# Altium PCB Pible_MODA.PcbDoc
Units mm, origin at the board's own origin, x right, y up, seen from the top; angles counter-clockwise.
Board outline 35.56 x 29.97 mm, 4 copper layers (Top Layer, Ground_Layer, Voltage_Layer, Bottom Layer), stack 0.778 mm thick; 52 components, 42 nets, 312 pads, 0 vias.
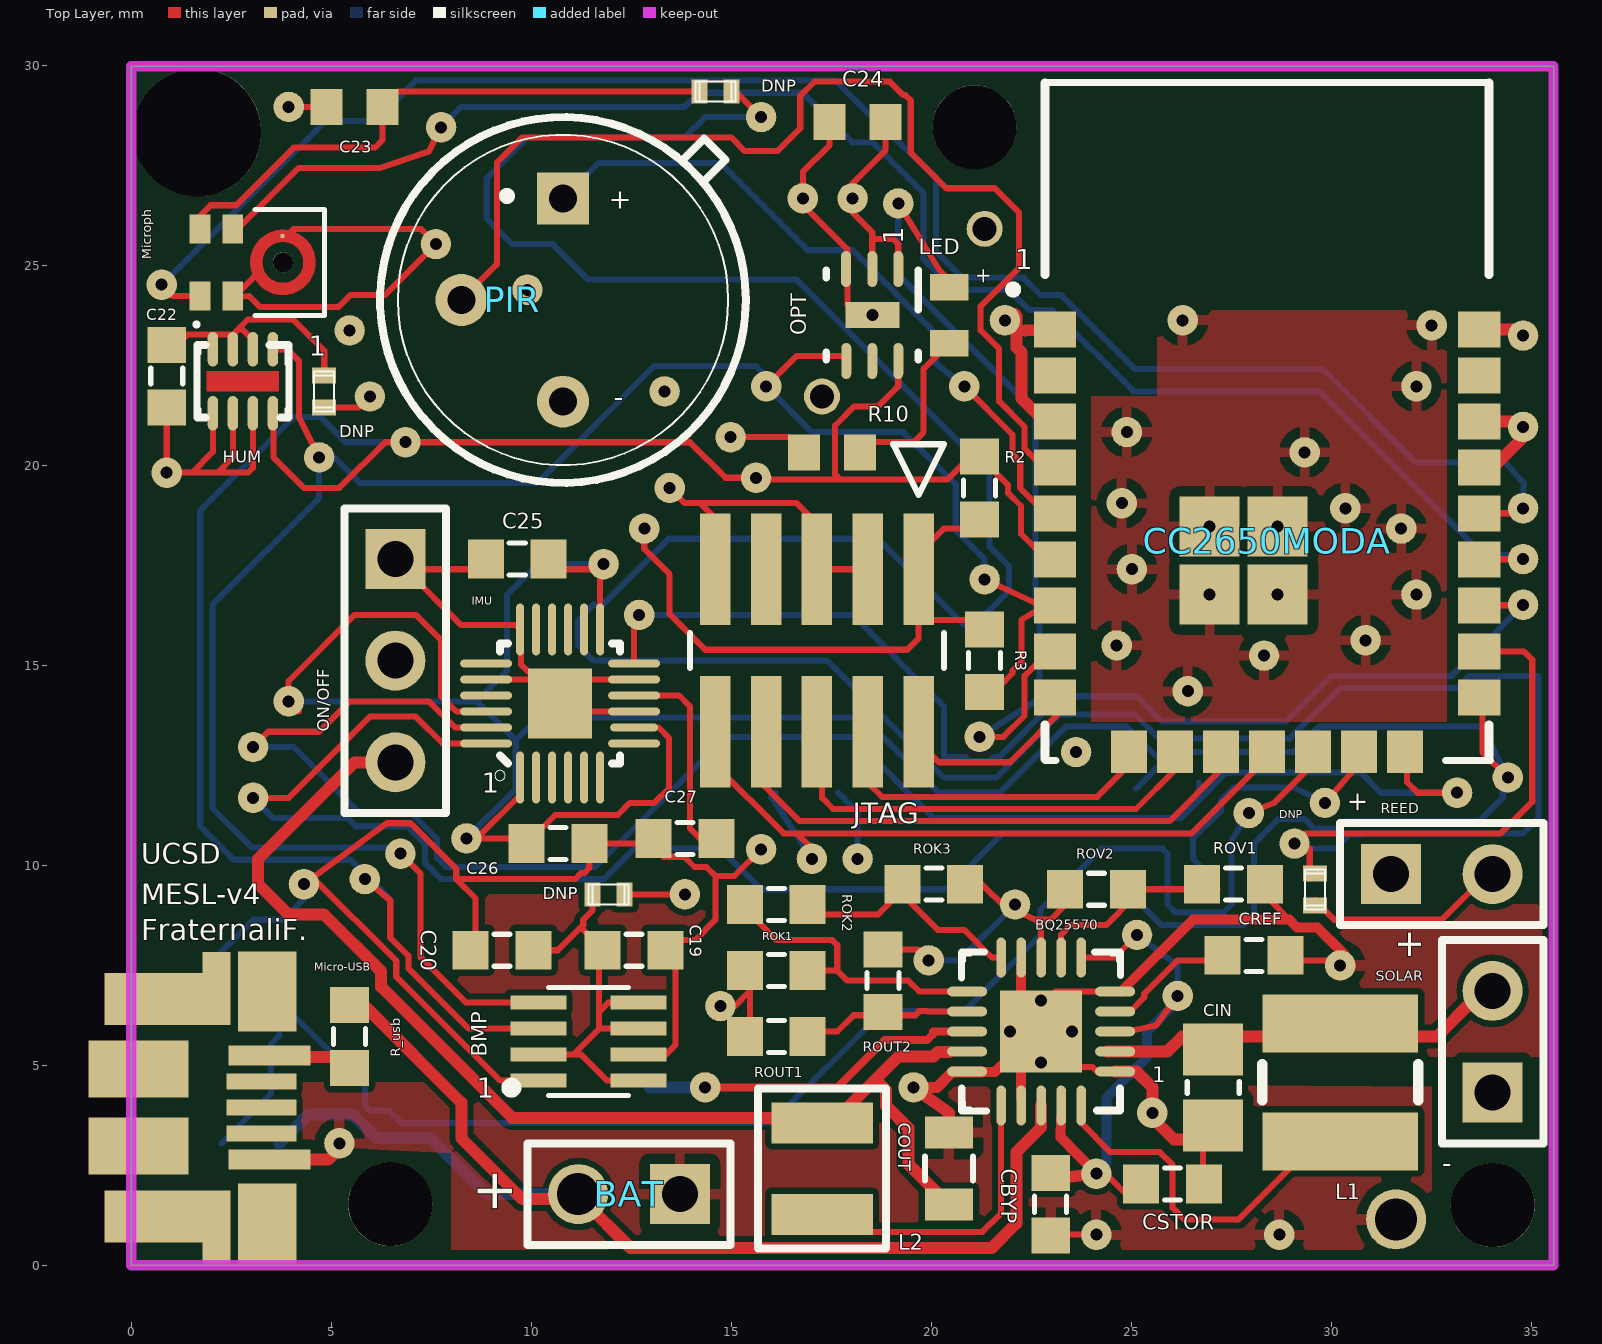
[diagram p0: Top Layer view]
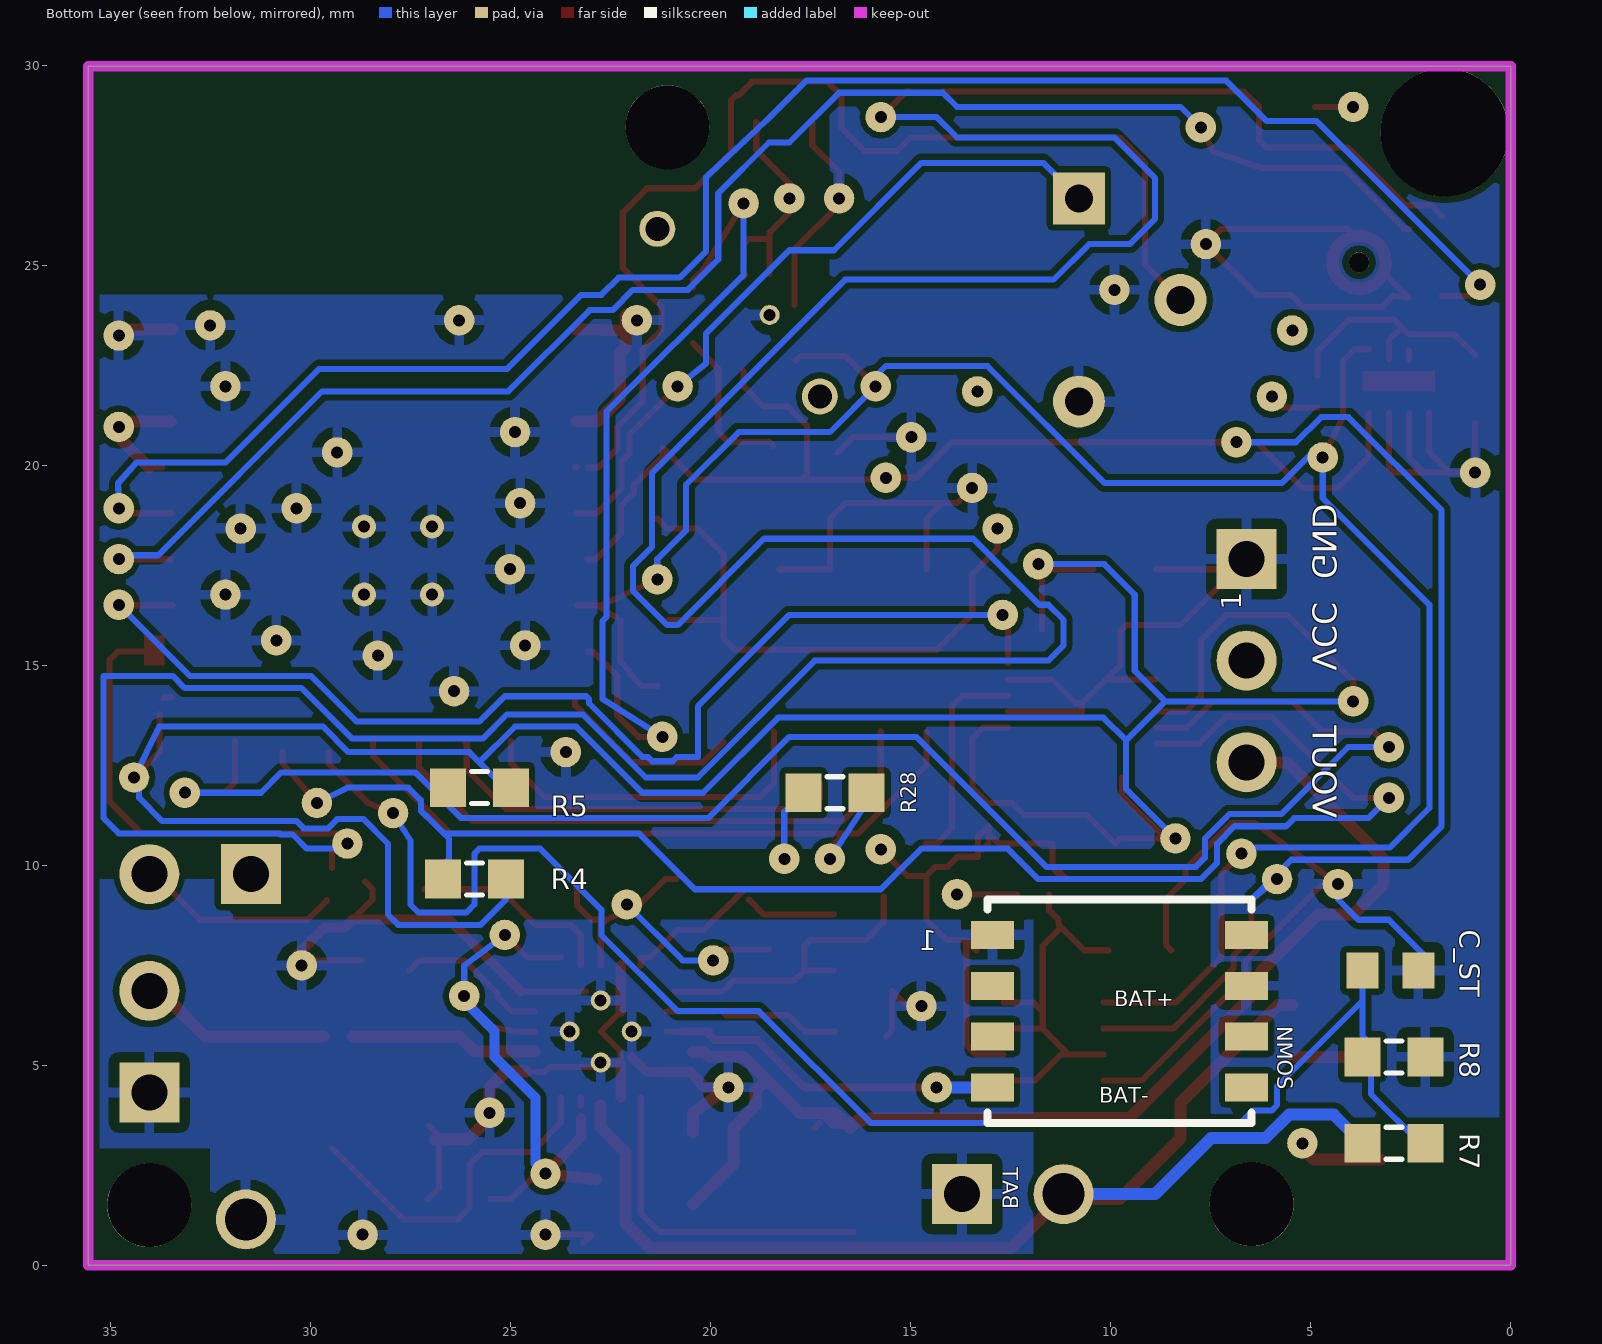
[diagram p1: Bottom Layer view, seen from below]
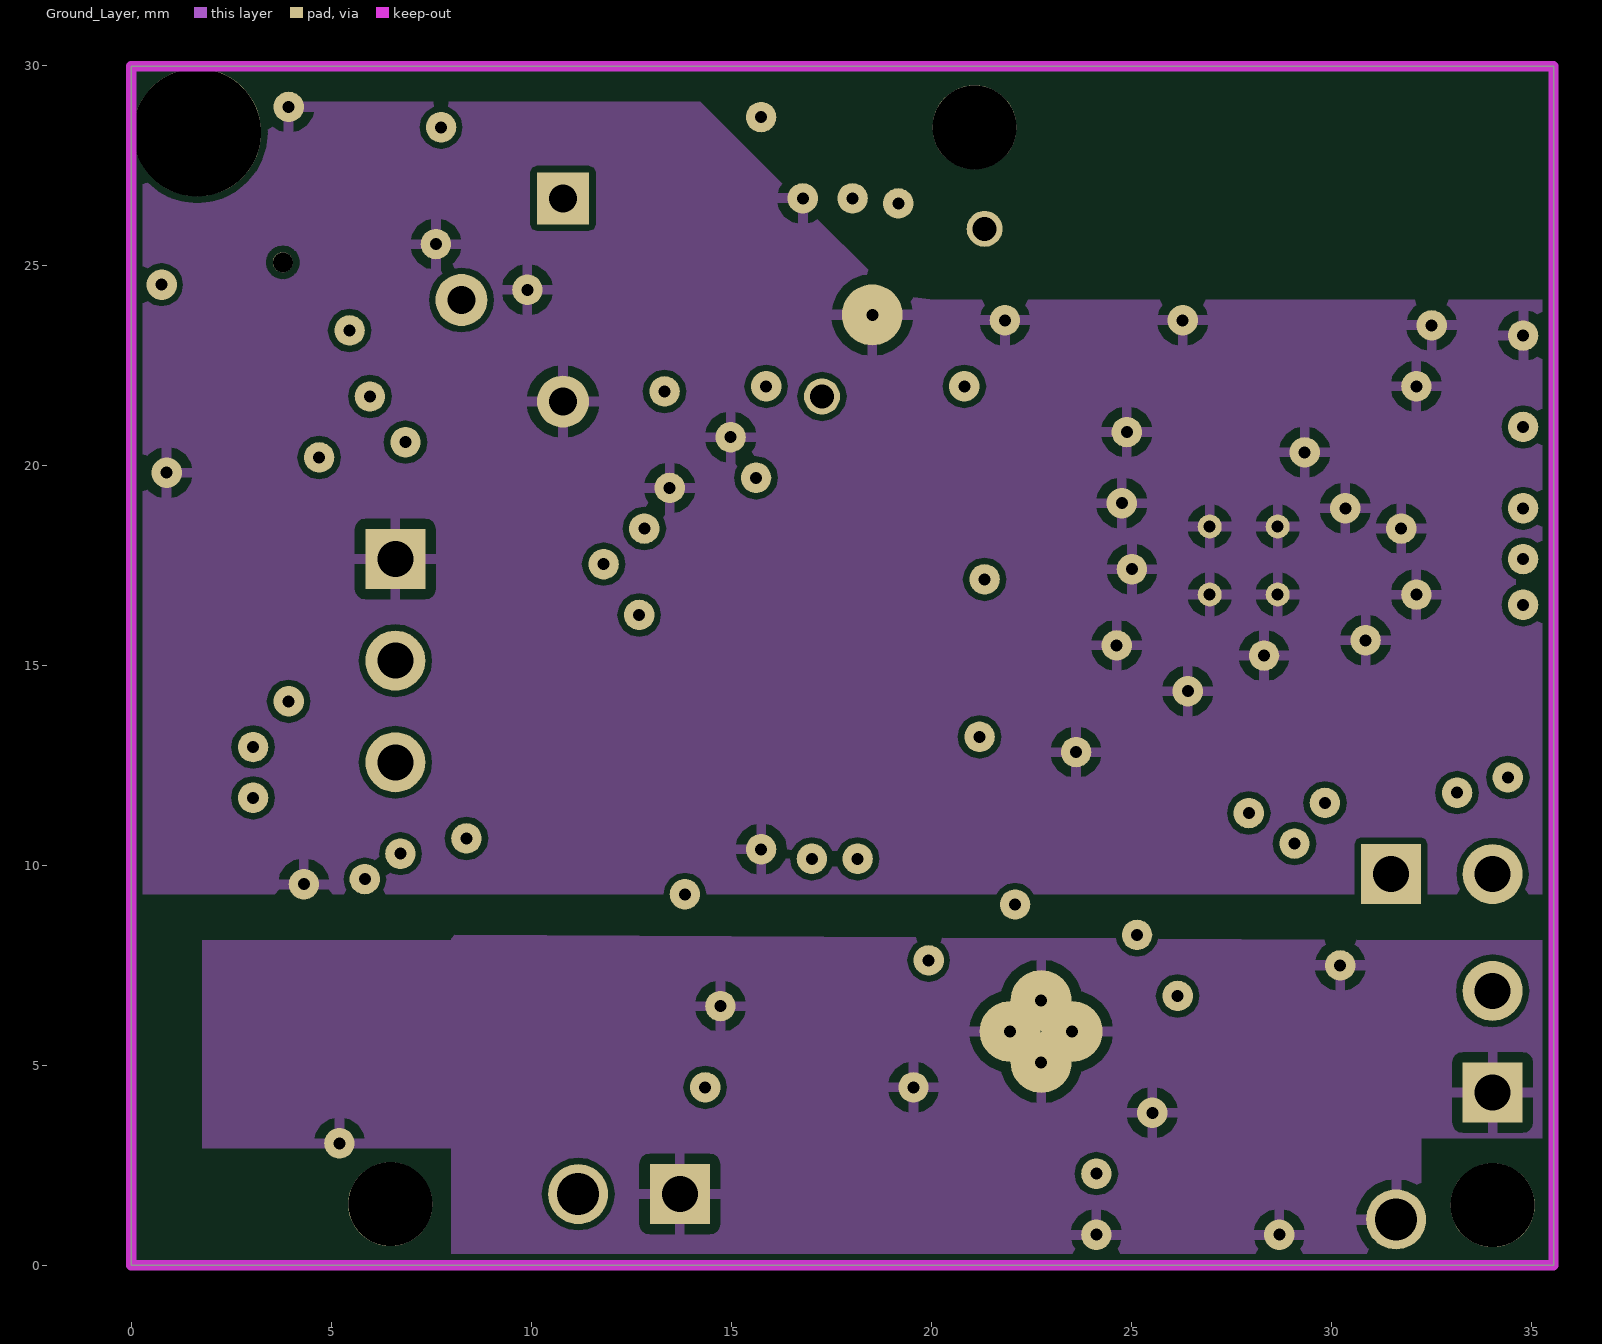
[diagram p2: Ground_Layer]
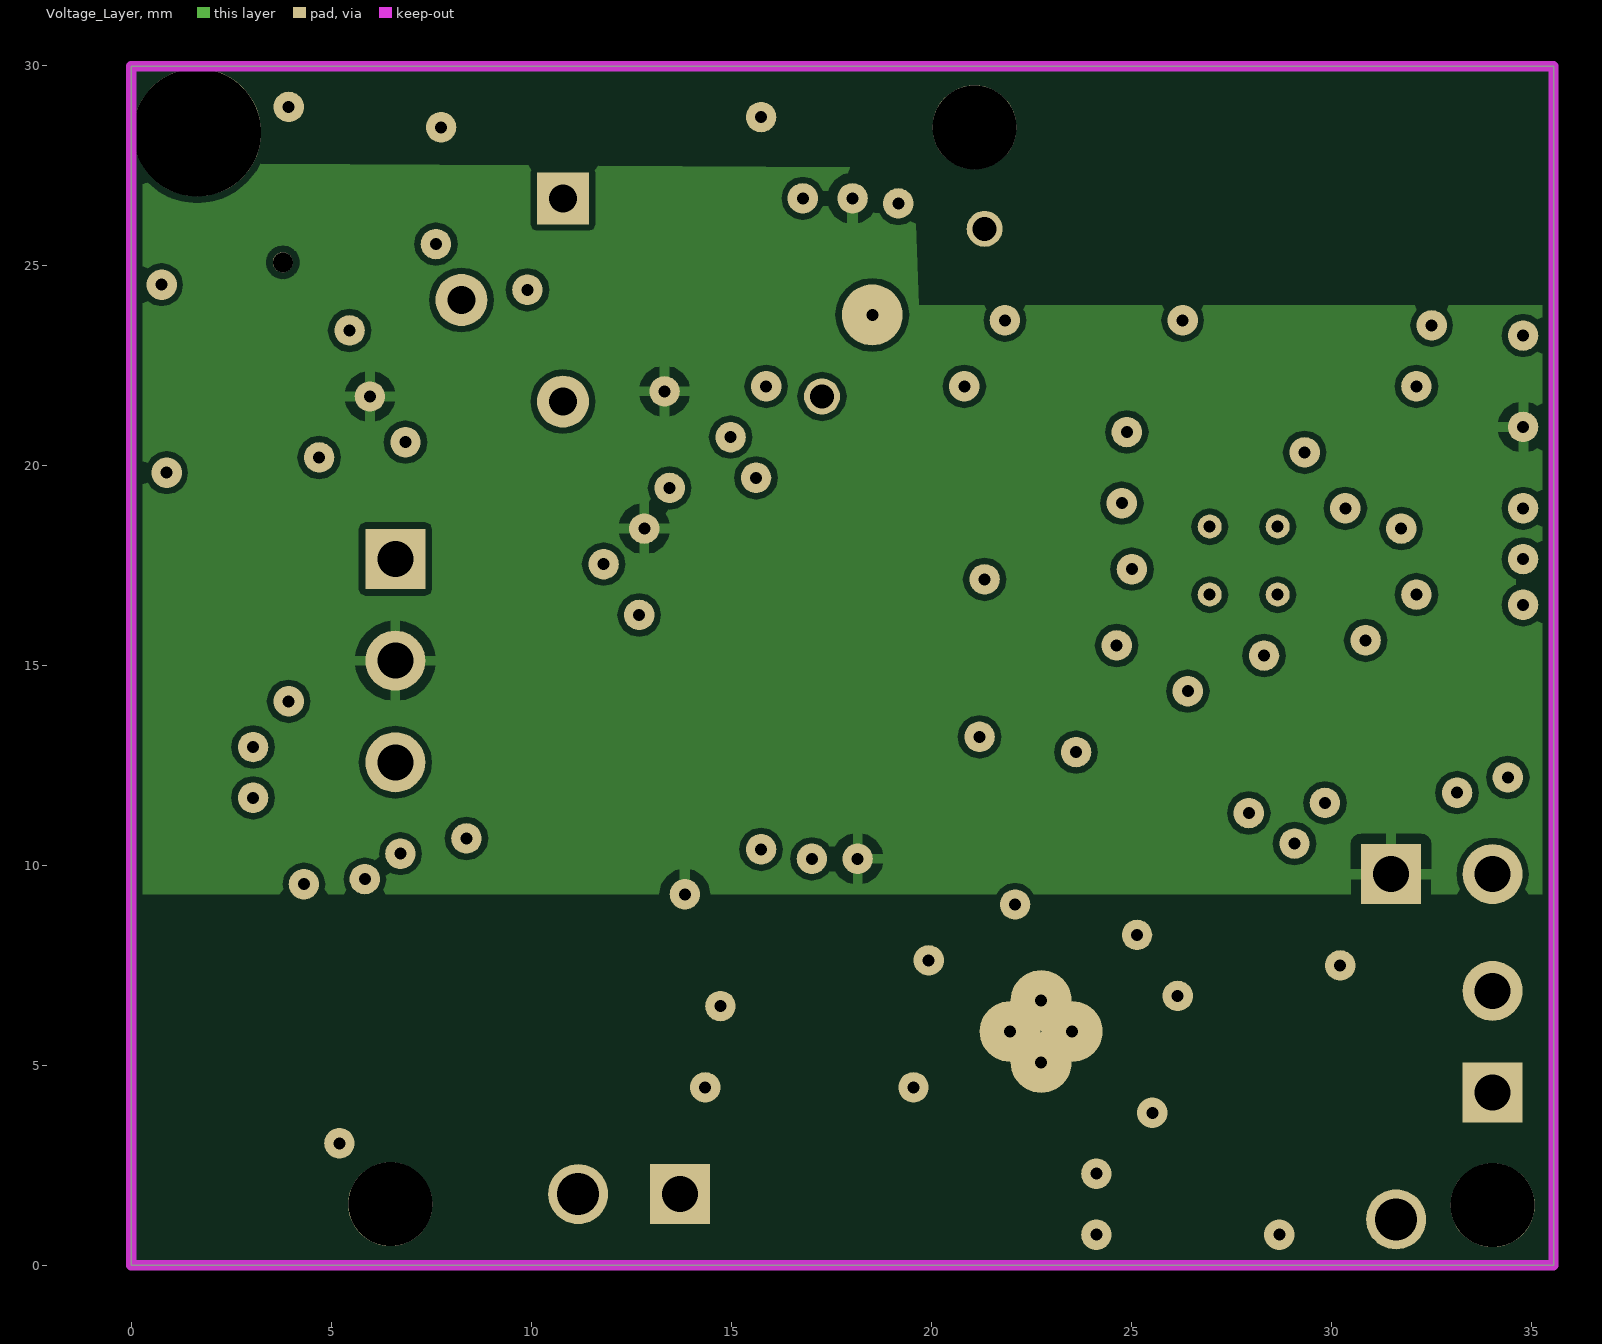
[diagram p3: Voltage_Layer]

## Layer stack, top to bottom
Top Solder: solder mask 0.0102, Solder Resist, Dk 3.5
Top Layer: signal copper 0.0356
Dielectric 1: core 0.254, FR-4, Dk 4.2
Ground_Layer: signal copper 0.036
Dielectric 3: prepreg 0.127, Dk 4.2
Voltage_Layer: signal copper 0.036
Dielectric 2: core 0.254, Dk 4.2
Bottom Layer: signal copper 0.0356
Bottom Solder: solder mask 0.0102, Solder Resist, Dk 3.5

## Board outline
0,0 35.56,0 35.56,29.972 0,29.972

## Design rules (kind name [scope] priority, off if disabled: settings)
Clearance "Stitching GND" [IsStitchingVia and InNet('GND') vs (IsVia and (Not IsStitchingVia)) Or IsPad] p1: gap=0.152 ignorepadtopadclearanceinfootprint=FALSE
Clearance [All] p2: gap=0.152 ignorepadtopadclearanceinfootprint=FALSE
ComponentClearance [All] p1: gap=0.076 collisioncheckmode=3 verticalgap=2540 showdistances=FALSE
HoleToHoleClearance [All] p1: gap=0.152 allowstackedmicrovias=TRUE
MinimumSolderMaskSliver [All] p1: minsoldermaskwidth=0.076
PolygonConnect [All] p1: connectstyle=Relief reliefconductorwidth=0.254 reliefentries=4 polygonreliefangle="90 Angle" airgapwidth=0.254
RoutingVias [All] p1: holewidth=0.381 width=0.508 viastyle="Through Hole" minholewidth=0.381 minwidth=0.508 maxholewidth=0.381 maxwidth=0.508
SilkToSilkClearance [All] p1: silktosilkclearance=0.152
SilkToSolderMaskClearance [IsPad] p1: minsilkscreentomaskgap=0.076 clearancetoexposedcopper=TRUE
SolderMaskExpansion [All] p1: expansion=0.102
Width [All] p1: maxlimit=0.3 minlimit=0.152 preferedwidth=0.152
25 further rules are at their usual default settings.

## Components (designator, comment, footprint, x,y, rotation, side; value= is the part's Value field where it differs from the comment)
BAT "Header 2" HDR1X2#1 13.716,1.778 r180 top
BMP "BMP280" LGA-8_BMP280(Primary) 11.43,5.588 r180 top
BQ25570 "BQ25570RGRR" RGR0020A 22.749,5.842 r180 top value=Value
C19 "Cap Semi" CAPC1608X90 12.573,7.874 r180 top value=100nF
C20 "Cap Semi" CAPC1608X90 9.271,7.874 r180 top value=100nF
C22 "Cap Semi" CAPC1608X90 0.889,22.225 r270 top value=100nF
C23 "Cap Semi" 1608[0603] 5.588,28.956 r180 top value=100nF
C24 "Cap Semi" 1608[0603] 18.161,28.575 r180 top value=100nF
C25 "Cap Semi" CAPC1608X90 9.652,17.653 r180 top value=100nF
C26 "Cap Semi" CAPC1608X90 10.668,10.541 r0 top value=10nF
C27 "Cap Semi" CAPC1608X90 13.843,10.668 r180 top value=100nF
C_ST "Cap Semi" 1608[0603] 3.007,7.366 r0 bottom value=10uF
CBYP "Cap Semi" CAPC1608X90 22.987,1.524 r90 top value=0.01uF
CC2650MODA "CC2650MODAMOHR" CC2650MODA_LONGER 13.794,13.089 r0 top
CIN "Cap Semi" CAPC2012X70 27.051,4.445 r90 top value=4.7uF
COUT "Cap Semi" 0805 20.447,2.413 r270 top value=22uF
CREF "Cap Semi" CAPC1608X90 28.067,7.747 r180 top value=10nF
CSTOR "Cap Semi" CAPC1608X90 26.035,2.032 r180 top value=4.7uF
DNP "Res3" 0402 11.938,9.271 r180 top
DNP "Res3" 0402 4.826,21.844 r270 top
DNP "Res3" 0402 14.605,29.337 r180 top
DNP "Res3" 0402 29.591,9.398 r90 top
HUM "HDC1000YPAR" YPA0008AGAE 2.794,22.098 r270 top value=Value
IMU "MPU-9250" QFN40P300X300X105-25N 10.722,14.042 r90 top (schematic designator MPU-9250)
JTAG "FTSH-105-01-L-DV-K" SAMTEC_FTSH-105-01-L-DV-K 17.145,15.367 r180 top
L1 "LPS4018-223MRB" LPS4018 30.226,4.572 r90 top
L2 "Inductor" 1008HQ 17.272,2.413 r90 top value=10uH
LED "LS L296-P2Q2-1" 1608 20.447,23.749 r270 top
Micro-USB "10103594-0001LF" POS-5 1.905,3.937 r270 top
Microph "SPH0641LU4H-1" MIC_SPH0641LU4H-1 3.792,25.071 r90 top (schematic designator Microphone)
NMOS "NMOS-2" SON8-Q5A 9.779,6.35 r270 bottom
ON/OFF "" HDR1X3 6.604,17.653 r270 top
OPT "OPT3001DNPR" DNP0006A 18.527,23.756 r270 top value=Value
PIR "" TO-39 10.795,24.13 r0 top
R2 "Res3" CAPC1608X90 21.209,19.431 r270 top value=10K
R3 "Res3" CAPC1608X90 21.336,15.113 r90 top value=10K
R4 "Res3" CAPC1608X90 25.908,9.652 r180 bottom value=10K
R5 "Res3" CAPC1608X90 25.781,11.938 r180 bottom value=10K
R7 "Res3" CAPC1608X90 2.921,3.048 r180 bottom value=10M
R8 "Res3" CAPC1608X90 2.921,5.207 r0 bottom value=6.8M
R10 "Res3" 1608[0603] 17.526,20.32 r0 top value=680
R28 "" CAPC1608X90 16.891,11.811 r0 bottom value=100K
R_usb "Res3" CAPC1608X90 5.461,5.715 r90 top value=150
REED "Header 2" HDR1X2#2 31.496,9.779 r0 top
ROK1 "Res3" CAPC1608X90 16.129,7.366 r0 top value=6.2M
ROK2 "Res3" CAPC1608X90 16.129,9.017 r0 top value=5.6M
ROK3 "Res3" CAPC1608X90 20.066,9.525 r0 top value=1.2M
ROUT1 "Res3" CAPC1608X90 16.129,5.715 r0 top value=6.2M
ROUT2 "Res3" CAPC1608X90 18.796,7.112 r90 top value=6.8M
ROV1 "Res3" CAPC1608X90 27.559,9.525 r180 top value=4.53M
ROV2 "Res3" CAPC1608X90 24.13,9.398 r180 top value=9.1M
SOLAR "Header 2" HDR1X2#2 34.036,4.318 r90 top (schematic designator Solar)

## Footprints (in the part's own frame and the unit in brackets; to place one, negate y for a bottom-side part, rotate by r counter-clockwise, add the part's x,y. Pads: shape width x height; smd on the part's side, far side on the other; paste and mask are expansions set on the pad)
0402 [mm]
  rect 0.4x0.6 smd mask-25.4: 1(-0.4,0) 2(0.4,0)
  silkscreen extent -0.5,-0.25 0.5,0.25
0805 [mm]
  rect 0.8x1.2 smd paste-25.4 mask-25.4: 1(-0.9,0) 2(0.9,0)
  silkscreen extent -0.3,-0.6 0.3,0.6
1008HQ [mm]
  rect 1.02x2.54 smd paste-25.4 mask-25.4: 1(-1.145,0) 2(1.145,0)
  silkscreen extent -2,-1.6 2,1.6
1608 [mil]
  rect 26x38 smd: 1(-27.5,0) 2(27.5,0)
1608[0603] [mm] "Chip Capacitor, Body 1.6x0.8mm, IPC High Density"
  rect 0.8x0.9 smd: 1(-0.7,0) 2(0.7,0)
  body extent -0.87,-0.48 0.87,0.48, height 1.3
CAPC1608X90 [mm]
  rect 0.9x0.97 smd paste-25.4 mask-25.4: 1(-0.785,0) 2(0.785,0)
  silkscreen extent -0.2,-0.4 0.2,0.4
CAPC2012X70 [mm]
  rect 1.3x1.5 smd paste-25.4 mask-25.4: 1(-0.95,0) 2(0.95,0)
  silkscreen extent -0.15,-0.65 0.15,0.65
CC2650MODA_LONGER [mm]
  rect 1.058x0.9 smd: 1(9.301,10.301) 2(9.301,9.151) 3(9.301,8.001) 4(9.301,6.851) 5(9.301,5.701) 6(9.301,4.551) 7(9.301,3.401) 8(9.301,2.251) 9(9.301,1.101) 17(19.909,1.101) 18(19.909,2.251) 19(19.909,3.401) 20(19.909,4.551) 21(19.909,5.701) 22(19.909,6.851) 23(19.909,8.001) 24(19.909,9.151) 25(19.909,10.301)
  rect 0.9x1.058 smd: 10(11.155,-0.255) 11(12.305,-0.255) 12(13.455,-0.255) 13(14.605,-0.255) 14(15.755,-0.255) 15(16.905,-0.255) 16(18.055,-0.255)
  rect 1.5x1.5 smd: 26(13.17,5.376) 27(13.17,3.676) 28(14.87,3.676) 29(14.87,5.376)
  round 0.6 hole 0.3: P$5(13.17,3.676) P$6(14.87,3.676) P$7(13.17,5.376) P$8(14.87,5.376)
  silkscreen extent 8.16,11.2 8.35,11.4
DNP0006A [mm]
  oval 0.9x0.25 smd paste+0 mask+0.051: 1(-1.15,0.65) 2(-1.15,0) 3(-1.15,-0.655) 4(1.15,-0.65) 5(1.15,0) 6(1.15,0.65)
  rect 0.65x1.35 smd paste-0.662 mask+0.051: 7(0,0)
  round 0.5 / inner round 1.524 / far side round 0.5 hole 0.3 mask+0.051: V(0,0)
  silkscreen extent -1.12,-1.15 1.12,1.15, body extent 0,0 0.25,0.25, height 0.25
HDR1X2#1 [mm] "Connector; Header; 2 Position"
  rect 1.5x1.5 hole 0.9: 1(0,0)
  round 1.5 hole 1.05: 2(2.54,0)
  silkscreen extent -1.27,-1.27 3.81,1.27
HDR1X2#2 [mm] "Connector; Header; 2 Position"
  rect 1.5x1.5 hole 0.9: 1(0,0)
  round 1.5 hole 0.9: 2(2.54,0)
  silkscreen extent -1.27,-1.27 3.81,1.27
HDR1X3 [mm] "Connector; Header; 3 Position"
  rect 1.5x1.5 hole 0.9: 1(0,0)
  round 1.5 hole 0.9: 2(2.54,0) 3(5.08,0)
  silkscreen extent -1.27,-1.27 6.35,1.27
LGA-8_BMP280(Primary) [mm]
  rect 1.4x0.35 smd paste+0 mask+0: P1(1.25,0.975) P2(1.25,0.325) P3(1.25,-0.325) P4(1.25,-0.975) P5(-1.25,-0.975) P6(-1.25,-0.325) P7(-1.25,0.325) P8(-1.25,0.975)
  silkscreen extent -1,-1.35 2.02,1.35
LPS4018 [mm]
  rect 1.45x3.89 smd: 1(-1.475,0) 2(1.475,0)
  silkscreen extent -0.45,-1.95 0.45,1.95
MIC_SPH0641LU4H-1 [mm]
  rect 0.725x0.522 smd: 1(-0.837,2.074) 2(-0.837,1.252) 4(0.837,1.252) 5(0.837,2.074)
  rect 0.1x0.1 smd: 3(0.656,0.012)
  round 0.5 hole 0.5 unplated: None(0,0)
  Top Layer region: 0.513,0 0.813,0 0.813,-0.021 0.81,-0.064 0.806,-0.106 0.799,-0.148 0.79,-0.19 0.779,-0.231 0.766,-0.271 0.751,-0.311 0.734,-0.35 0.714,-0.388 0.693,-0.425 0.67,-0.46 0.645,-0.495 0.618,-0.528 0.59,-0.559 0.559,-0.59 0.528,-0.618 0.495,-0.645 0.46,-0.67 0.425,-0.693 0.388,-0.714 0.35,-0.734 0.311,-0.751 0.271,-0.766 0.231,-0.779 0.19,-0.79 0.148,-0.799 0.106,-0.806 0.064,-0.81 0.021,-0.813 0,-0.813 0,-0.513 0.013,-0.513 0.04,-0.511 0.067,-0.508 0.093,-0.504 0.12,-0.499 0.146,-0.492 0.171,-0.483 0.196,-0.474 0.221,-0.463 0.245,-0.451 0.268,-0.437 0.29,-0.423 0.312,-0.407 0.333,-0.39 0.353,-0.372 0.372,-0.353 0.39,-0.333 0.407,-0.312 0.423,-0.29 0.437,-0.268 0.451,-0.245 0.463,-0.221 0.474,-0.196 0.483,-0.171 0.492,-0.146 0.499,-0.12 0.504,-0.093 0.508,-0.067 0.511,-0.04 0.513,-0.013 0.513,0
  Top Layer region: 0,-0.513 0,-0.813 -0.021,-0.813 -0.064,-0.81 -0.106,-0.806 -0.148,-0.799 -0.19,-0.79 -0.231,-0.779 -0.271,-0.766 -0.311,-0.751 -0.35,-0.734 -0.388,-0.714 -0.425,-0.693 -0.46,-0.67 -0.495,-0.645 -0.528,-0.618 -0.559,-0.59 -0.59,-0.559 -0.618,-0.528 -0.645,-0.495 -0.67,-0.46 -0.693,-0.425 -0.714,-0.388 -0.734,-0.35 -0.751,-0.311 -0.766,-0.271 -0.779,-0.231 -0.79,-0.19 -0.799,-0.148 -0.806,-0.106 -0.81,-0.064 -0.813,-0.021 -0.813,0 -0.513,0 -0.513,-0.013 -0.511,-0.04 -0.508,-0.067 -0.504,-0.093 -0.499,-0.12 -0.492,-0.146 -0.483,-0.171 -0.474,-0.196 -0.463,-0.221 -0.451,-0.245 -0.437,-0.268 -0.423,-0.29 -0.407,-0.312 -0.39,-0.333 -0.372,-0.353 -0.353,-0.372 -0.333,-0.39 -0.312,-0.407 -0.29,-0.423 -0.268,-0.437 -0.245,-0.451 -0.221,-0.463 -0.196,-0.474 -0.171,-0.483 -0.146,-0.492 -0.12,-0.499 -0.093,-0.504 -0.067,-0.508 -0.04,-0.511 -0.013,-0.513 0,-0.513
  Top Layer region: -0.513,0 -0.813,0 -0.813,0.021 -0.81,0.064 -0.806,0.106 -0.799,0.148 -0.79,0.19 -0.779,0.231 -0.766,0.271 -0.751,0.311 -0.734,0.35 -0.714,0.388 -0.693,0.425 -0.67,0.46 -0.645,0.495 -0.618,0.528 -0.59,0.559 -0.559,0.59 -0.528,0.618 -0.495,0.645 -0.46,0.67 -0.425,0.693 -0.388,0.714 -0.35,0.734 -0.311,0.751 -0.271,0.766 -0.231,0.779 -0.19,0.79 -0.148,0.799 -0.106,0.806 -0.064,0.81 -0.021,0.813 0,0.813 0,0.513 -0.013,0.513 -0.04,0.511 -0.067,0.508 -0.093,0.504 -0.12,0.499 -0.146,0.492 -0.171,0.483 -0.196,0.474 -0.221,0.463 -0.245,0.451 -0.268,0.437 -0.29,0.423 -0.312,0.407 -0.333,0.39 -0.353,0.372 -0.372,0.353 -0.39,0.333 -0.407,0.312 -0.423,0.29 -0.437,0.268 -0.451,0.245 -0.463,0.221 -0.474,0.196 -0.483,0.171 -0.492,0.146 -0.499,0.12 -0.504,0.093 -0.508,0.067 -0.511,0.04 -0.513,0.013 -0.513,0
  Top Layer region: 0,0.513 0,0.813 0.021,0.813 0.064,0.81 0.106,0.806 0.148,0.799 0.19,0.79 0.231,0.779 0.271,0.766 0.311,0.751 0.35,0.734 0.388,0.714 0.425,0.693 0.46,0.67 0.495,0.645 0.528,0.618 0.559,0.59 0.59,0.559 0.618,0.528 0.645,0.495 0.67,0.46 0.693,0.425 0.714,0.388 0.734,0.35 0.751,0.311 0.766,0.271 0.779,0.231 0.79,0.19 0.799,0.148 0.806,0.106 0.81,0.064 0.813,0.021 0.813,0 0.513,0 0.513,0.013 0.511,0.04 0.508,0.067 0.504,0.093 0.499,0.12 0.492,0.146 0.483,0.171 0.474,0.196 0.463,0.221 0.451,0.245 0.437,0.268 0.423,0.29 0.407,0.312 0.39,0.333 0.372,0.353 0.353,0.372 0.333,0.39 0.312,0.407 0.29,0.423 0.268,0.437 0.245,0.451 0.221,0.463 0.196,0.474 0.171,0.483 0.146,0.492 0.12,0.499 0.093,0.504 0.067,0.508 0.04,0.511 0.013,0.513 0,0.513
  silkscreen extent -1.6,-1.04 1.33,2.21
POS-5 [mm]
  rect 0.5x2.05 smd: 1(-1.3,1.55) 5(1.3,1.55)
  rect 0.4x1.75 smd: 2(-0.65,1.35) 3(0,1.35) 4(0.65,1.35)
  rect 2x1.46 smd: PAD1(-2.902,1.494) PAD2(2.897,1.496)
  rect 1.825x0.7 smd: PAD3(-2.985,0.23) PAD5(2.985,0.23)
  rect 1.3x3.15 smd: PAD4(-2.723,-1.001) PAD6(2.723,-1.001)
  rect 1.425x2.5 smd: PAD7(-0.961,-1.727) PAD8(0.963,-1.726)
QFN40P300X300X105-25N [mm]
  oval 1.3x0.2 smd paste+0.01: 1(-1.85,1) 2(-1.85,0.6) 3(-1.85,0.2) 4(-1.85,-0.2) 5(-1.85,-0.6) 6(-1.85,-1) 13(1.85,-1) 14(1.85,-0.6) 15(1.85,-0.2) 16(1.85,0.2) 17(1.85,0.6) 18(1.85,1)
  oval 0.2x1.3 smd paste+0.01: 7(-1,-1.85) 9(-0.2,-1.85) 10(0.2,-1.85) 11(0.6,-1.85) 12(1,-1.85) 19(1,1.85) 20(0.6,1.85) 21(0.2,1.85) 22(-0.2,1.85) 23(-0.6,1.85) 24(-1,1.85)
  oval 0.2x1.2 smd paste+0.01: 8(-0.6,-1.85)
  rect 1.75x1.6 smd mask-25.4: 25(0,0)
  silkscreen extent -1.93,-1.5 1.5,1.63
RGR0020A [mm]
  oval 1x0.24 smd paste+0 mask+0.051: 1(-1.85,1) 2(-1.85,0.5) 3(-1.85,0) 4(-1.85,-0.5) 5(-1.85,-1) 11(1.85,-1) 12(1.85,-0.5) 13(1.85,0) 14(1.85,0.5) 15(1.85,1)
  oval 0.24x1 smd paste+0 mask+0.051: 6(-1,-1.85) 7(-0.5,-1.85) 8(0,-1.85) 9(0.5,-1.85) 10(1,-1.85) 16(1,1.85) 17(0.5,1.85) 18(0,1.85) 19(-0.5,1.85) 20(-1,1.85)
  rect 2.05x2.05 smd paste-1.025 mask+0.051: 21(0,0)
  round 0.5 / inner round 1.524 / far side round 0.5 hole 0.3 mask+0.051: V(-0.775,0) V(0,0.775) V(0,-0.775) V(0.775,0)
  silkscreen extent -1.97,-1.97 1.97,1.97, body extent 0,0 0.25,0.25, height 0.25
SAMTEC_FTSH-105-01-L-DV-K [mil]
  rect 30x110 smd paste-1000 mask-1000: 1(-100,-80) 2(-100,80) 3(-50,-80) 4(-50,80) 5(0,-80) 6(0,80) 7(50,-80) 8(50,80) 9(100,-80) 10(100,80)
  silkscreen extent -125,-203 125,17
SON8-Q5A [mm]
  rect 0.7x1.067 smd: 1(-1.905,-3.175) 2(-0.635,-3.175) 3(0.635,-3.175) 4(1.905,-3.175) 5(1.905,3.175) 6(0.635,3.175) 7(-0.635,3.175) 8(-1.905,3.175)
  silkscreen extent -2.79,-3.3 2.79,3.3
TO-39 [mm]
  rect 1.3x1.3 hole 0.7: 1(0,2.54)
  round 1.3 hole 0.7: 2(-2.54,0) 3(0,-2.54)
  silkscreen extent -4.57,-4.57 4.57,4.57
YPA0008AGAE [mm]
  oval 0.863x0.263 smd paste-0.01 mask+0.051: A1(-0.8,0.75) A2(0.8,0.75) B1(-0.8,0.25) B2(0.8,0.25) C1(-0.8,-0.25) C2(0.8,-0.25) D1(-0.8,-0.75) D2(0.8,-0.75)
  Top Layer region: -0.25,0.9 -0.25,-0.9 0.25,-0.9 0.25,0.9
  silkscreen extent -0.91,-1.14 0.91,1.14, body extent 0,0 0.25,0.25, height 0.25

## Part data
BAT REED SOLAR: "Header, 2-Pin", LatestRevisionDate=17-Jul-2002, LatestRevisionNote="Re-released for DXP Platform.", Publisher="Altium Limited"
BMP: "BMP280 Absolute Barometric Pressure Sensor for Battery Powered Devices 2 x 2.5mm", Package=None, Availability=Good, MF=Bosch, MP=BMP280, Price="Average Price:   $2.00 USD"
BQ25570: "Imported", Alternate_PartNumber=BQ25570RGRT, Manufacturer="Texas Instruments", CompType=IC, MountType=SMT, PackageReference=RGR0020A, PartNumber=BQ25570RGRR, PIN_COUNT=21, RefDes=RefDes, RoHS=Y, TYPE=TYPE
C19 C20 C22 C23 C24 C25 C26 C27 C_ST CBYP CIN COUT CREF CSTOR: "Capacitor (Semiconductor SIM Model)", LatestRevisionDate=29-May-2009, LatestRevisionNote="IPC-7351 Footprint Added.", PackageDescription="Chip Capacitor", PackageReference=C1206, Published=8-Jun-2000, Publisher="Altium Limited"
CC2650MODA: "SimpleLink%E2%84%A2 Bluetooth%C2%AE low energy Wireless MCU Module 29-QFM -40 to 85", Package="SMD-29 Texas Instruments", Availability=Good, MF="Texas Instruments", MP=CC2650MODAMOHR, Price="8.68 USD"
DNP DNP DNP DNP R2 R3 R4 R5 R7 R8 R10 R_usb ROK1 ROK2 ROK3 ROUT1 ROUT2 ROV1 ROV2: "Resistor", LatestRevisionDate=29-May-2009, LatestRevisionNote="IPC-7351 Footprint Added.", PackageDescription="Chip Resistor", PackageReference=J1-0603, Published=8-Jun-2000, Publisher="Altium Limited"
HUM: "Imported", Alternate_PartNumber=HDC1000YPAT, Manufacturer="Texas Instruments", CompType=IC, MountType=SMT, PackageReference=YPA0008AGAE, PartNumber=HDC1000YPAR, PIN_COUNT=8, RefDes=RefDes, RoHS=Y, TYPE=TYPE
IMU: "SMD%20Gyroscope/Accelerometer/Magnetometer%20Sensor%3B%209-AXIS", Package="QFN-24 InvenSense", Availability=Good, MF=InvenSense, MP=MPU-9250, Price="6.51 USD"
JTAG: "Conn Unshrouded Header HDR 10 POS 1.27mm Solder ST SMD Automotive Tube", Package=None, Availability=Good, MF=Samtec, MP=FTSH-105-01-L-DV-K, Price="2.18 USD"
L1: "COILCRAFT - LPS4018-223MRB - INDUCTOR, SHLD, 22UH, 20%, 0.65A, SMD", Manufacturer_Name=COILCRAFT, Datasheet Link=http://www.coilcraft.com/pdfs/lps4018.pdf, Height=mm, Manufacturer_Part_Number=LPS4018-223MRB, Supplier_Name=RS
LED: library part LED3, "Typical BLUE SiC LED", DatasheetVersion=16-Apr-2002, LatestRevisionDate=17-Dec-2003, LatestRevisionNote="PCB Footprint replaced.", PackageDescription="SM LED; 2 C-Bend Leads; Body 3.5 x 2.8 x 1.9 mm, inc leads (LxWxH typ)", PackageReference=3.5X2.8X1.9, PackageVersion=16-Apr-2002, Published=8-Jun-2000, Publisher="Altium Limited"
Micro-USB: "Conn Micro USB Type B RCP 5 POS 0.65mm Solder RA SMD 5 Terminal 1 Port T/R", Package="FakePackage u", Availability=Unavailable, MF="Amphenol FCI", MP=10103594-0001LF, Price=None, SnapEDA_Link=https://www.snapeda.com/parts/10103594-0001LF/Amphenol%20FCI/view-part/?ref=snap
Microph: "Mic Mems Digital Pdm Omni -26db", Package="MAPBGA-400 NXP Semiconductors", Availability=Unavailable, MF=Knowles, MP=SPH0641LU4H-1, Price=None, SnapEDA_Link=https://www.snapeda.com/parts/SPH0641LU4H-1/Knowles/view-part/?ref=snap
NMOS: "N-Channel Power MOSFET", ComponentLink1Description="Manufacturer Link", ComponentLink1URL=http://www.irf.com/, DatasheetVersion=PD-9.814, LatestRevisionDate=17-Jul-2002, LatestRevisionNote="Re-released for DXP Platform.", Note="Pin 2 is electrically connected to pin 4.", PackageDescription="TO, Thru-Hole, Vertical, Heatsink Mounted; 3 In-Line Leads; Pitch 2.54 mm", PackageReference=TO-220AB, PackageVersion=Feb-1997, Published=8-Jun-2000, Publisher="Altium Limited"
ON/OFF PIR: library part "Header 3", "Header, 3-Pin", LatestRevisionDate=17-Jul-2002, LatestRevisionNote="Re-released for DXP Platform.", Publisher="Altium Limited"
OPT: "Imported", Manufacturer="Texas Instruments", PartNumber=OPT3001DNP, CompType=IC, MountType=SMT, PackageReference=DNP0006A, PIN_COUNT=7, RefDes=RefDes, RoHS=Y, TYPE=TYPE
R28: library part Res3, "Resistor", LatestRevisionDate=29-May-2009, LatestRevisionNote="IPC-7351 Footprint Added.", PackageDescription="Chip Resistor", PackageReference=J1-0603, Published=8-Jun-2000, Publisher="Altium Limited"
L2: Code_IEC=1005, Code_JEITA=0402, LatestRevisionDate=29-May-2009, LatestRevisionNote="IPC-7351 Footprint Added.", PackageDescription="Chip Inductor", PackageReference=0402-A, Published=8-Jun-2000, Publisher="Altium Limited"

## Free pads (board coordinates)
  round 0.762 hole 0.3: 2(0.762,24.511) 2(0.889,19.812) 2(3.048,11.684) 2(3.048,12.954) 2(3.937,14.097) 2(3.937,28.956) 2(4.318,9.525) 2(4.699,20.193) 2(5.207,3.048) 2(5.461,23.368) 2(5.842,9.652) 2(5.969,21.717) 2(6.731,10.287) 2(6.858,20.574) 2(7.62,25.527) 2(7.747,28.448) 2(8.382,10.668) 2(9.906,24.384) 2(11.811,17.526) 2(12.7,16.256) 2(12.827,18.415) 2(13.335,21.844) 2(13.462,19.431) 2(13.843,9.271) 2(14.351,4.445) 2(14.732,6.477) 2(14.986,20.701) 2(15.621,19.685) 2(15.748,10.396) 2(15.748,28.702) 2(15.875,21.971) 2(16.791,26.67) 2(17.018,10.16) 2(18.034,26.67) 2(18.161,10.16) 2(19.177,26.543) 2(19.558,4.445) 2(19.939,7.62) 2(20.828,21.971) 2(21.209,13.208) 2(21.336,17.145) 2(21.844,23.622) 2(22.098,9.017) 2(23.622,12.827) 2(24.13,0.762) 2(24.13,2.286) 2(24.638,15.494) 2(24.765,19.05) 2(24.892,20.828) 2(25.019,17.399) 2(25.146,8.255) 2(25.527,3.81) 2(26.162,6.731) 2(26.289,23.622) 2(26.416,14.351) 2(27.94,11.303) 2(28.321,15.24) 2(28.702,0.762) 2(29.083,10.541) 2(29.337,20.32) 2(29.845,11.557) 2(30.226,7.493) 2(30.353,18.923) 2(30.861,15.621) 2(31.75,18.415) 2(32.131,16.764) 2(32.131,21.971) 2(32.512,23.495) 2(33.147,11.811) 2(34.417,12.192) 2(34.798,16.51) 2(34.798,17.653) 2(34.798,18.923) 2(34.798,20.955) 2(34.798,23.241)
  round 0.9 hole 0.6: 2(17.272,21.717) 2(21.336,25.908)
  round 1.5 hole 1.05: 2(31.623,1.143)
  round 3.2 hole 3.2: 3(1.651,28.321)
  round 2.1 hole 2.1: 3(6.477,1.524) 3(21.082,28.448) 3(34.036,1.5)

## Nets (pads, with @x,y where several pads share a name; then routed paths per layer and width w, separated by ;. In a path a pad name is that pad's centre, name@x,y a point inside that pad or via, vN(x,y) a via of type N, cw(c..) or ccw(c..) an arc to the next point about the centre after c; other vN are vias at no path point)
AUDIO_CLK: CC2650MODA.20 Microph.4 pad.2@7.747,28.448 pad.2@34.798,17.653 | length 40.8
  Top Layer w0.152: Microph.4 2.667,25.908 4.191,27.432 6.223,27.432 7.442,27.838 pad.2@7.747,28.448 ; CC2650MODA.20@33.491,17.648 pad.2@34.798,17.648
  Bottom Layer w0.152: pad.2@7.747,28.448 8.255,28.956 13.843,28.956 14.199,29.312 16.789,29.312 18.034,28.067 18.542,28.067 19.812,26.797 19.812,25.146 20.574,24.384 21.944,24.384 22.452,23.876 23.029,23.876 25.061,21.844 29.718,21.844 33.814,17.748 pad.2@34.798,17.748
AUDIO_DI: CC2650MODA.21 Microph.1 pad.2@0.762,24.511 pad.2@34.798,18.923 | length 44.2
  Top Layer w0.152: pad.2@0.762,24.511 1.04,24.233 Microph.1 ; CC2650MODA.21@33.491,18.798 34.673,18.798 pad.2@34.798,18.923
  Bottom Layer w0.152: pad.2@0.762,24.511 4.851,28.6 6.095,28.6 7.111,29.616 17.608,29.616 18.604,28.621 20.039,27.276 20.117,27.199 20.117,25.349 20.777,24.689 22.301,24.689 22.733,24.257 23.241,24.257 25.089,22.409 29.788,22.409 32.131,20.066 34.353,20.066 34.818,19.55 pad.2@34.798,19.177
GND: BMP.P1 BMP.P7 C19.1 C20.2 C22.2 C23.2 C24.2 C25.2 C26.2 C27.2 C_ST.1 CC2650MODA.1 CC2650MODA.3 CC2650MODA.25 CC2650MODA.26 CC2650MODA.27 CC2650MODA.28 CC2650MODA.29 CC2650MODA.P$5 CC2650MODA.P$6 CC2650MODA.P$7 CC2650MODA.P$8 HUM.B2 HUM.C2 HUM.D2 IMU.9 IMU.11 IMU.18 IMU.20 IMU.25 JTAG.3 JTAG.5 JTAG.9 Microph.2 Microph.3 NMOS.7 ON/OFF.1 OPT.3 OPT.7 OPT.V pad.2@0.889,19.812 pad.2@3.937,28.956 pad.2@4.318,9.525 pad.2@7.62,25.527 pad.2@9.906,24.384 pad.2@13.462,19.431 pad.2@14.986,20.701 pad.2@15.748,10.396 pad.2@16.791,26.67 pad.2@21.844,23.622 pad.2@23.622,12.827 pad.2@24.638,15.494 pad.2@24.765,19.05 pad.2@24.892,20.828 pad.2@25.019,17.399 pad.2@26.289,23.622 pad.2@26.416,14.351 pad.2@28.321,15.24 pad.2@29.337,20.32 pad.2@30.353,18.923 pad.2@30.861,15.621 pad.2@31.75,18.415 pad.2@32.131,16.764 pad.2@32.131,21.971 pad.2@32.512,23.495 pad.2@34.798,23.241 PIR.3 R8.1 R10.1 | length 90.4
  Top Layer w0.152: C22.2@0.889,21.059 0.889,19.812 1.524,19.812 ; HUM.D2 2.044,20.332 1.524,19.812 ; HUM.C2 2.544,20.197 2.159,19.812 ; HUM.B2 3.044,19.935 2.921,19.812 2.159,19.812 ; 3.077,24.712 2.561,24.196 2.945,24.233 3.228,23.95 5.181,23.95 5.488,24.257 6.35,24.257 7.62,25.527 7.239,25.908 4.064,25.908 3.937,25.781 3.81,25.781 ; pad.2@3.937,28.956 C23.2 ; pad.2@4.318,9.525 pad.2@4.544,9.691 ; pad.2@4.537,9.698 pad.2@4.544,9.691 ; ON/OFF.1 ON/OFF.1@6.858,17.399 ; C20.2 8.613,8.001 8.613,9.167 8.128,9.652 ; C25.2@8.867,17.399 ON/OFF.1@6.858,17.399 ; IMU.20 IMU.25@10.122,14.642 ; BMP.P1 9.23,4.613 6.627,7.216 6.627,7.608 pad.2@4.544,9.691 ; IMU.9 10.722,13.842 IMU.25 ; IMU.11 11.467,14.642 10.867,14.042 IMU.25 ; BMP.P7 13.37,5.263 13.612,5.505 C19.1@13.612,8.128 ; C27.2@12.995,10.731 12.804,10.541 C26.2 11.453,9.929 11.324,9.8 11.243,9.8 11.096,9.652 8.128,9.652 ; C27.2@13.058,10.541 C27.2@13.208,10.391 ; C27.2 13.058,10.98 13.314,10.723 13.314,10.211 13.827,10.211 14.083,9.954 14.381,9.954 14.605,9.731 ; C19.1 C19.1@13.612,8.128 ; pad.2@13.462,19.431 13.843,19.05 14.224,19.05 ; JTAG.9 14.605,18.669 14.224,19.05 ; pad.2@14.986,20.701 16.445,20.701 R10.1 ; pad.2@15.748,10.396 15.083,9.731 14.605,9.731 ; C24.2 17.461,28.002 16.791,27.332 16.791,26.67 16.791,26.516 17.907,25.4 OPT.7@17.907,24.003 ; JTAG.3@18.288,17.399 JTAG.5 17.018,17.399 17.018,18.669 16.637,19.05 14.224,19.05 ; CC2650MODA.3@23.349,21.098 CC2650MODA.3@23.391,21.098 ; CC2650MODA.1@23.349,23.398 CC2650MODA.1@23.391,23.398 ; CC2650MODA.26@26.906,18.415 CC2650MODA.26@27.051,18.56 ; CC2650MODA.29@28.575,18.562 CC2650MODA.29@28.664,18.473 ; CC2650MODA.25@33.449,23.398 CC2650MODA.25@33.479,23.368 ; pad.2@34.641,23.398 pad.2@34.798,23.241 ; 1.524,19.812 2.159,19.812 ; pad.2@4.544,9.691 6.396,11.049 6.985,11.049 8.128,9.906 8.128,9.652 ; ON/OFF.1@6.858,17.399 8.255,16.002 9.612,16.002 IMU.18 9.751,15.863 9.751,15.013 IMU.25@10.122,14.642 ; IMU.25@10.122,14.642 IMU.25 ; C19.1@13.612,8.128 14.097,8.128 14.605,8.636 14.605,9.731
  Top Layer w0.3: pad.2@21.844,23.622 22.098,23.782 22.104,23.772 22.136,23.717 22.136,22.943 22.264,22.815 22.264,21.665 22.831,21.098 CC2650MODA.3@23.349,21.098 ; 22.352,23.37 CC2650MODA.1 CC2650MODA.1@23.349,23.398 ; CC2650MODA.25@33.449,23.398 pad.2@34.641,23.398
  Bottom Layer w0.152: C_ST.1@2.136,7.724 3.048,8.636 3.81,8.636 4.318,9.144 pad.2@4.318,9.525 ; ON/OFF.1@6.604,18.161 ON/OFF.1@6.985,17.78
GND1: BAT.1 BQ25570.1 BQ25570.5 BQ25570.9 BQ25570.15 BQ25570.17 BQ25570.21 BQ25570.V CBYP.1 CIN.1 COUT.1 CREF.1 CSTOR.1 Micro-USB.5 NMOS.1 pad.2@5.207,3.048 pad.2@14.732,6.477 pad.2@19.558,4.445 pad.2@24.13,0.762 pad.2@25.527,3.81 pad.2@28.702,0.762 pad.2@30.226,7.493 pad.2@31.623,1.143 ROK1.1 ROUT1.1 ROV1.1 SOLAR.1 | length 33.1
  Top Layer w0.152: pad.2@14.732,6.477 15.09,6.477 15.471,6.858 15.471,5.865 ROUT1.1@15.621,5.715 ; BQ25570.21@22.249,5.057 22.249,5.342 BQ25570.21 BQ25570.21@22.249,6.342 ; BQ25570.21@22.622,4.953 24.034,4.953 24.161,4.826 BQ25570.1@24.384,4.826 ; BQ25570.21@23.114,6.842 BQ25570.5 BQ25570.5@24.749,6.842 ; CBYP.1@23.189,0.56 CBYP.1 23.01,0.762 pad.2@24.13,0.762 ; pad.2@25.527,3.683 pad.2@25.527,3.81 ; CIN.1 26.797,3.241 26.797,3.144 26.797,1.928 CSTOR.1@27.074,1.651 ; ROV1.1@28.639,9.588 28.459,9.41 28.459,9.133 28.956,8.636 ; CREF.1@28.725,7.62 29.972,7.62 30.226,7.493 30.226,7.874
  Top Layer w0.2: BQ25570.21@22.249,5.057 BQ25570.21@22.899,5.057
  Top Layer w0.25: BQ25570.5@24.749,6.842 26.543,8.636 28.956,8.636 29.146,8.445 29.654,8.445 30.226,7.874 pad.2@30.353,7.747
  Top Layer w0.252: BQ25570.15@21.28,4.827 21.591,4.827 BQ25570.21@21.971,5.207 ; BQ25570.17@22.249,4.192 BQ25570.21@22.249,5.057 ; BQ25570.21@22.249,6.342 BQ25570.9@22.249,7.492
  Top Layer w0.27: pad.2@19.558,4.445 20.143,4.445 20.525,4.827 BQ25570.15@21.28,4.827
  Top Layer w0.3: Micro-USB.5@3.255,2.637 Micro-USB.5 4.923,2.637 pad.2@5.207,2.921 ; pad.2@19.558,4.445 20.447,3.81 COUT.1 ; BQ25570.1 25.13,4.842 25.527,4.445 pad.2@25.527,3.81 ; pad.2@25.527,3.683 26.066,3.144 26.797,3.144 CIN.1@26.893,3.144
JTAG_TCK: CC2650MODA.10 JTAG.4 | length 8.9
  Top Layer w0.152: JTAG.4 18.415,12.065 18.771,11.709 24.155,11.709 24.991,12.545 CC2650MODA.10@24.991,13.098
JTAG_TDO: CC2650MODA.11 JTAG.6 | length 10.5
  Top Layer w0.152: JTAG.6@17.272,12.065 17.272,11.684 17.551,11.405 25.121,11.405 26.099,12.383 CC2650MODA.11 26.099,13.098 CC2650MODA.11@26.141,13.098
JTAG_TMS: CC2650MODA.9 JTAG.2 | length 4.7
  Top Layer w0.152: JTAG.2@19.685,13.081 20.193,12.573 21.971,12.573 23.391,13.993 CC2650MODA.9@23.391,14.198
LED1: CC2650MODA.8 LED.1 pad.2@19.177,26.543 pad.2@21.209,13.208 | length 21.5
  Top Layer w0.152: pad.2@19.177,26.543 20.193,24.892 20.447,24.638 LED.1 ; pad.2@21.209,13.208 21.803,13.208 22.337,13.742 22.337,14.735 22.943,15.34 CC2650MODA.8
  Bottom Layer w0.152: pad.2@19.177,26.543 19.177,24.765 22.606,21.336 22.606,16.204 22.708,16.102 22.708,14.16 pad.2@21.209,13.208
MIC_PWR: C23.1 DNP.2@14.205,29.337 Microph.5 | length 14.3
  Top Layer w0.152: Microph.5@1.717,26.228 1.988,26.499 2.623,26.499 4.064,27.94 6.096,27.94 6.288,28.132 C23.1 6.669,29.337 DNP.2@14.205,29.337
MPU_INT: CC2650MODA.19 IMU.12 pad.2@12.7,16.256 pad.2@34.798,16.51 | length 29.2
  Top Layer w0.152: IMU.12 12.572,16.128 pad.2@12.7,16.256 ; CC2650MODA.19@33.449,16.498 34.786,16.498 pad.2@34.798,16.51
  Bottom Layer w0.152: pad.2@12.7,16.256 18.034,16.256 20.32,13.97 20.32,12.7 20.855,12.7 20.956,12.598 21.462,12.598 21.563,12.7 21.699,12.7 23.041,14.042 23.041,14.151 23.114,14.224 25.146,14.224 25.781,13.589 28.854,13.589 29.997,14.732 33.02,14.732 pad.2@34.798,16.51
MPU_PWR: C25.1 C26.1 CC2650MODA.17 IMU.1 IMU.8 IMU.13 IMU.22 pad.2@3.937,14.097 pad.2@8.382,10.668 pad.2@11.811,17.526 pad.2@34.417,12.192 R4.2 R5.2 | length 79.5
  Top Layer w0.152: pad.2@4.192,13.842 3.937,14.097 3.937,14.605 5.588,16.256 7.112,16.256 7.747,15.621 7.747,14.224 8.129,13.842 IMU.22 ; IMU.1 9.722,11.754 8.636,10.668 9.756,10.668 C26.1 10.597,11.255 12.167,11.255 12.469,11.557 13.081,11.557 13.451,11.927 13.451,13.178 13.187,13.442 IMU.8 ; C25.1@10.437,17.399 11.722,17.399 IMU.13 ; CC2650MODA.17@33.491,14.198 33.658,14.198 CC2650MODA.17@33.684,14.172 ; CC2650MODA.17@33.782,13.775 33.782,12.827 pad.2@34.417,12.192
  Bottom Layer w0.152: pad.2@3.937,14.097 8.636,14.097 ; pad.2@8.382,10.668 9.614,11.9 9.614,13.119 ; pad.2@11.811,17.526 10.16,17.526 9.398,16.764 9.398,14.859 8.636,14.097 ; R4.2 25.123,9.14 25.754,8.509 27.813,8.509 28.067,8.763 28.067,10.541 28.677,11.151 29.336,11.151 29.564,10.922 30.176,10.922 30.354,11.1 33.706,11.1 34.29,11.684 34.29,11.938 34.417,12.192 33.782,13.462 29.691,13.462 29.056,12.827 26.035,12.827 25.781,12.573 ; R5.2@25.123,11.915 25.781,12.573 ; 8.636,14.097 9.614,13.119 ; 9.614,13.119 10.185,13.691 18.313,13.691 20.193,11.811 21.716,11.811 23.367,13.462 24.892,13.462 25.781,12.573
NetBAT_2: 
NetBMP_P2: BMP.P2 BMP.P5 BMP.P6 BMP.P8 C19.2 C20.1 DNP.2@11.538,9.271 | length 10.8
  Top Layer w0.152: C20.1 10.668,7.874 11.239,8.445 ; BMP.P2 11.049,5.263 ; DNP.2@11.538,9.271 11.538,8.871 11.303,8.636 11.303,8.509 11.239,8.445 ; BMP.P8 11.897,4.613 11.247,5.263 11.049,5.263 ; BMP.P6 11.699,5.913 ; BMP.P5 11.927,6.563 11.699,6.335 ; 11.049,5.263 11.699,5.913 ; 11.239,8.445 11.699,7.986 11.699,6.335 ; 11.699,5.913 11.699,6.335
NetBQ25570_2: BQ25570.2 CIN.2 L1.2 SOLAR.2 | length 9
  Top Layer w0.3: BQ25570.2@24.399,5.342 BQ25570.2 25.9,5.342 26.273,5.715 L1.2@28.956,5.715 ; L1.2@29.669,5.715 32.639,5.715 SOLAR.2@33.591,6.667
NetBQ25570_4: BQ25570.4 CREF.2 | length 3.8
  Top Layer w0.152: BQ25570.4@24.399,6.342 BQ25570.4 24.972,6.342 25.328,6.698 25.328,6.786 26.162,7.62 27.282,7.62 CREF.2@27.536,7.366
NetBQ25570_7: BQ25570.7 ROV1.2 ROV2.1 | length 5.4
  Top Layer w0.152: BQ25570.7@23.249,7.492 BQ25570.7 23.249,8.263 23.495,8.509 24.384,8.509 25.042,9.167 ROV2.1@25.042,9.398 ; ROV2.1 ROV2.1@25.042,9.398 ; ROV1.2@27.155,9.398 ROV2.1@25.042,9.398
NetBQ25570_8: BQ25570.8 pad.2@19.939,7.62 pad.2@22.098,9.017 ROK3.2 ROUT2.2 ROV2.2 | length 9.2
  Top Layer w0.152: ROUT2.2@18.542,7.897 ROUT2.2 19.662,7.897 pad.2@19.939,7.62 ; ROK3.2@20.851,9.652 21.143,9.652 22.001,8.793 22.098,9.017 22.167,8.835 22.606,8.636 ; BQ25570.8@22.749,7.492 BQ25570.8 22.749,8.493 22.606,8.636 ; ROV2.2 23.345,8.994 22.987,8.636 22.606,8.636
  Bottom Layer w0.152: pad.2@19.939,7.62 20.701,7.62 pad.2@22.098,9.017
NetBQ25570_10: BQ25570.10 ROK2.2 ROK3.1 | length 5.8
  Top Layer w0.152: ROK2.2@16.914,8.763 18.669,8.763 ROK3.1@19.05,9.144 ; ROK3.1@19.154,9.398 20.17,8.382 20.828,8.382 21.518,7.692 BQ25570.10 BQ25570.10@21.749,7.492
NetBQ25570_11: BQ25570.11 ROK1.2 ROK2.1 | length 7.7
  Top Layer w0.152: ROK2.1@15.673,9.219 15.673,8.584 16.129,8.128 17.526,8.128 17.653,8.001 17.653,7.366 ; ROK1.2 17.653,7.366 ; BQ25570.11 19.701,6.842 19.431,7.112 17.907,7.112 17.653,7.366
NetBQ25570_12: BQ25570.12 ROUT1.2 ROUT2.1 | length 4.4
  Top Layer w0.152: ROUT1.2@16.891,5.842 17.653,5.842 18.059,6.248 19.606,6.248 19.685,6.327 ; 19.685,6.35 19.916,6.35 19.924,6.342 BQ25570.12 BQ25570.12@21.099,6.342
NetBQ25570_16: BQ25570.16 L2.1 | length 8.4
  Top Layer w0.152: L2.1@16.436,0.834 21.281,0.834 21.749,1.302 BQ25570.16 BQ25570.16@21.749,4.192
NetBQ25570_20: BQ25570.20 L1.1 | length 8.7
  Top Layer w0.152: BQ25570.20@23.749,4.192 BQ25570.20 23.749,3.556 24.479,2.826 25.715,2.826 26.035,2.505 26.035,1.432 26.324,1.143 27.686,1.143 L1.1@29.464,2.921
NetC22_1: C22.1 DNP.1@4.826,22.244 HUM.B1 HUM.C1 HUM.D1 | length 6.4
  Top Layer w0.152: C22.1@0.889,22.756 1.397,23.264 2.54,23.264 2.667,23.391 ; HUM.C1@2.544,22.644 HUM.C1@2.544,22.864 ; HUM.B1@3.044,22.644 HUM.B1@3.044,22.889 ; HUM.B1 3.044,23.133 2.786,23.391 2.667,23.391 ; DNP.1@4.826,22.244 4.826,22.86 4.041,23.645 2.921,23.645 2.667,23.391
NetC27_1: C27.1 IMU.10 | length 5.4
  Top Layer w0.152: IMU.10 13.698,14.242 13.97,13.97 13.97,10.922 14.351,10.541 C27.1@14.628,10.541
NetDNP_1: DNP.1@29.591,8.998 REED.2 | length 5
  Top Layer w0.152: DNP.1@29.591,9.125 30.08,8.636 32.766,8.636 REED.2@33.909,9.779
NetLED_2: LED.2 R10.2 | length 4
  Top Layer w0.152: R10.2@18.439,20.485 18.528,20.575 19.559,20.575 19.812,20.828 19.812,22.415 LED.2
NetMicro-Usb_1: Micro-USB.1 R_usb.1 | length 1.6
  Top Layer w0.3: Micro-USB.1@3.818,5.207 R_usb.1@5.461,5.207
PIR: CC2650MODA.4 PIR.2 | length 28.3
  Top Layer w0.152: PIR.2 9.144,25.019 9.144,27.559 9.779,28.194 14.999,28.194 15.343,27.85 16.153,27.85 16.727,28.424 16.727,29.234 17.083,29.591 18.967,29.591 19.304,29.254 19.356,29.254 19.49,29.12 19.49,27.815 20.381,26.924 21.59,26.924 22.2,26.314 22.2,24.941 21.234,23.976 21.234,23.369 21.698,22.906 21.698,21.595 22.337,20.955 22.337,20.412 22.809,19.94 CC2650MODA.4 ; CC2650MODA.4@23.349,19.948 CC2650MODA.4@23.391,19.948
PIR_PWR: CC2650MODA.5 pad.2@20.828,21.971 PIR.1 | length 17.7
  Top Layer w0.152: pad.2@20.828,21.971 22.033,20.766 22.033,20.285 22.227,20.091 22.227,19.429 22.866,18.79 CC2650MODA.5 ; CC2650MODA.5@23.112,18.798 CC2650MODA.5@23.349,18.798
  Bottom Layer w0.152: PIR.1 11.684,27.559 14.732,27.559 16.918,25.373 18.034,25.373 20.119,23.288 20.119,22.545 20.635,22.128 20.653,21.953 20.671,21.778 pad.2@20.686,21.766
REED: CC2650MODA.18 DNP.1@15.005,29.337 DNP.2@29.591,9.798 pad.2@15.748,28.702 pad.2@29.083,10.541 | length 90.5
  Top Layer w0.152: DNP.1@15.005,29.337 15.113,29.337 pad.2@15.748,28.702 ; DNP.2@29.464,9.925 29.464,10.414 29.083,10.541 29.337,10.795 34.238,10.795 35.027,11.584 35.027,15.138 34.825,15.34 CC2650MODA.18
  Bottom Layer w0.152: pad.2@15.748,28.702 14.351,28.702 13.843,28.194 9.906,28.194 8.89,27.178 8.89,26.162 9.525,25.527 10.541,25.527 11.43,24.638 16.637,24.638 21.463,19.812 21.463,17.957 21.946,17.474 21.946,16.866 21.082,16.002 20.828,16.002 18.669,18.161 13.435,18.161 11.784,16.51 11.557,16.51 11.176,16.129 11.176,15.494 11.557,15.113 17.399,15.113 20.32,12.192 21.622,12.192 23.197,13.767 25.095,13.767 25.692,13.17 28.968,13.17 30.225,14.427 33.146,14.427 33.451,14.732 35.179,14.732 35.179,11.176 34.798,10.795 30.784,10.795 30.759,10.77 30.455,10.77 30.099,10.414 29.464,10.414 pad.2@29.083,10.541
RESET_N: CC2650MODA.13 JTAG.10 pad.2@17.018,10.16 R28.1 | length 19.4
  Top Layer w0.152: JTAG.10 14.605,12.504 16.314,10.795 16.62,10.795 ; pad.2@17.018,10.16 16.999,10.46 16.62,10.795 ; CC2650MODA.13@28.441,13.098 28.441,12.724 26.512,10.795 16.62,10.795
  Bottom Layer w0.152: R28.1 16.002,11.707 pad.2@17.018,10.16
SC_VOL: C_ST.2 CC2650MODA.14 pad.2@27.94,11.303 R7.2 R8.2 | length 39.7
  Top Layer w0.152: pad.2@27.94,11.303 28.575,11.557 29.549,12.531 CC2650MODA.14
  Bottom Layer w0.152: R7.2@2.263,3.048 3.494,4.279 3.494,5.526 3.706,5.738 3.706,6.604 ; C_ST.2 3.707,6.605 3.706,6.604 ; pad.2@27.94,11.303 27.508,10.617 27.508,9.017 27.305,8.814 26.111,8.814 25.908,9.017 25.908,10.287 25.781,10.414 24.257,10.414 22.733,8.89 22.733,8.255 20.828,6.35 18.796,6.35 16.002,3.556 6.754,3.556 6.444,3.866 5.976,3.866 5.842,4 5.842,4.468 3.706,6.604
SCL: BMP.P4 CC2650MODA.7 HUM.A1 OPT.4 pad.2@4.699,20.193 pad.2@6.731,10.287 pad.2@15.875,21.971 pad.2@21.336,17.145 R3.1 | length 53.4
  Top Layer w0.152: HUM.A1 3.899,22.898 4.191,22.606 4.191,21.209 pad.2@4.699,20.193 ; pad.2@6.731,10.287 7.237,9.781 7.237,7.698 8.372,6.563 BMP.P4 ; pad.2@15.875,21.971 16.637,22.733 17.75,22.733 OPT.4 ; R3.1@21.336,14.478 21.717,14.478 22.033,14.794 22.033,14.861 22.255,15.084 22.255,16.129 CC2650MODA.7@22.835,16.49 ; pad.2@21.336,17.145 22.753,16.49 CC2650MODA.7@22.835,16.49 ; CC2650MODA.7 CC2650MODA.7@22.835,16.49 ; CC2650MODA.7@23.095,16.498 CC2650MODA.7@23.349,16.498
  Bottom Layer w0.152: pad.2@4.699,20.193 4.699,19.177 2.032,16.51 2.032,11.43 3.023,10.439 6.579,10.439 pad.2@6.731,10.287 ; pad.2@4.826,20.447 5.715,19.558 10.16,19.558 13.081,22.479 15.621,22.479 15.875,22.225 15.875,21.971 17.018,20.828 19.304,20.828 20.615,19.517 20.615,18.374 21.336,17.653 pad.2@21.336,17.145
"SCL HP": CC2650MODA.16 IMU.23 pad.2@3.048,12.954 pad.2@33.147,11.811 R5.1 | length 43.9
  Top Layer w0.152: pad.2@3.048,12.954 3.429,13.335 4.699,13.335 5.461,14.097 7.443,14.097 8.098,13.442 IMU.23 ; CC2650MODA.16@31.891,13.098 31.891,12.079 32.159,11.811 pad.2@33.147,11.811
  Bottom Layer w0.152: pad.2@3.048,12.954 4.064,12.954 5.74,11.278 7.034,11.278 7.645,10.666 7.645,10.185 7.873,9.957 11.608,9.957 14.859,13.208 18.034,13.208 20.066,11.176 26.241,11.176 R5.1@26.693,11.628 ; R5.1@26.693,12.065 R5.1@26.693,11.628 ; pad.2@33.147,11.811 31.242,11.811 30.734,12.319 27.384,12.319 R5.1@26.693,11.628
SCLK/TDI: CC2650MODA.12 JTAG.8 | length 14.4
  Top Layer w0.152: JTAG.8@15.748,13.335 15.748,12.065 16.713,11.1 25.959,11.1 27.291,12.432 CC2650MODA.12@27.291,13.098
SDA: BMP.P3 CC2650MODA.6 HUM.A2 OPT.6 pad.2@5.842,9.652 pad.2@6.858,20.574 pad.2@15.621,19.685 R2.1 | length 54.9
  Top Layer w0.152: HUM.A2 3.556,21.286 3.556,20.193 4.318,19.431 5.207,19.431 6.35,20.574 6.858,20.574 13.97,20.574 14.859,19.685 15.621,19.685 15.665,19.641 17.731,19.641 ; pad.2@5.842,9.652 6.477,9.119 6.477,8.189 6.932,7.735 6.932,7.419 8.438,5.913 BMP.P3 ; OPT.6@19.177,22.352 19.177,21.971 18.669,21.463 18.069,21.463 17.597,20.992 17.597,19.756 17.616,19.756 17.731,19.641 ; CC2650MODA.6 22.892,17.64 22.246,18.286 22.246,18.979 21.923,19.302 21.923,19.502 R2.1 21.209,20.447 20.403,19.641 17.731,19.641
  Bottom Layer w0.152: pad.2@5.842,9.652 6.452,9.169 5.486,10.135 2.565,10.135 1.727,10.973 1.727,18.872 4.058,21.203 4.74,21.203 5.37,20.574 pad.2@6.858,20.574
"SDA HP": CC2650MODA.15 IMU.24 pad.2@3.048,11.684 pad.2@29.845,11.557 R4.1 | length 39.8
  Top Layer w0.152: pad.2@3.048,11.684 3.937,11.684 5.969,13.716 7.112,13.716 7.786,13.042 IMU.24 ; pad.2@29.845,11.557 30.699,12.538 CC2650MODA.15
  Bottom Layer w0.152: pad.2@3.048,11.684 3.556,11.176 5.411,11.176 5.614,10.973 6.907,10.973 7.341,10.54 7.341,10.058 7.747,9.652 11.811,9.652 12.573,10.414 14.732,10.414 15.748,9.398 20.397,9.398 21.794,10.795 26.67,10.795 ; R4.1 26.693,10.01 26.543,10.16 26.543,10.668 26.67,10.795 ; pad.2@29.845,11.557 29.083,11.938 27.559,11.938 27.245,11.624 27.245,11.358 27.111,11.224 27.099,11.224 26.67,10.795
VBAT: BAT.2 BQ25570.18 R7.1 R_usb.2 | length 31.7
  Top Layer w0.3: R_usb.2 5.819,6.5 8.255,4.064 8.255,3.175 9.779,1.651 11.264,1.651 12.485,0.431 21.513,0.431 22.13,1.048 22.13,2.826 22.749,3.445 BQ25570.18
  Bottom Layer w0.3: R7.1 4.422,3.764 5.543,3.764 6.132,3.175 7.493,3.175 8.89,1.778 BAT.2
VBAT_OK: BQ25570.13 NMOS.4 pad.2@14.351,4.445 | length 8.8
  Top Layer w0.152: BQ25570.13@20.701,5.842 BQ25570.13 BQ25570.13@21.099,5.842
  Top Layer w0.2: pad.2@14.351,4.445 17.653,4.445 18.833,5.625 19.894,5.625 20.041,5.772 20.041,5.842 BQ25570.13@20.701,5.842
  Bottom Layer w0.3: NMOS.4 pad.2@14.351,4.445
VCC: C24.1 CC2650MODA.22 CC2650MODA.23 DNP.1@12.338,9.271 DNP.2@4.826,21.444 JTAG.1 ON/OFF.2 OPT.1 OPT.2 pad.2@5.969,21.717 pad.2@12.827,18.415 pad.2@13.335,21.844 pad.2@13.843,9.271 pad.2@18.034,26.67 pad.2@18.161,10.16 pad.2@34.798,20.955 R2.2 R3.2 R28.2 REED.1 | length 28
  Top Layer w0.152: DNP.2@4.826,21.444 5.696,21.444 pad.2@5.95,21.698 ; DNP.1@12.338,9.271 pad.2@13.843,9.271 ; pad.2@12.827,18.415 12.827,17.907 13.462,17.272 13.462,16.275 14.351,15.386 19.399,15.386 19.685,15.672 JTAG.1@19.685,16.129 ; OPT.2@18.527,24.779 OPT.2 18.527,25.654 ; C24.1 18.861,27.878 18.034,27.051 18.034,26.67 18.034,26.315 18.527,25.822 18.527,25.654 ; OPT.1@19.144,24.76 OPT.1@19.173,24.711 ; OPT.1 19.177,25.527 19.05,25.654 18.527,25.654 ; R3.2@21.059,16.129 JTAG.1@19.685,16.129 ; R2.2@21.336,18.669 21.082,18.415 20.32,18.415 19.685,17.78 JTAG.1 JTAG.1@19.685,16.129 ; CC2650MODA.22 CC2650MODA.22@34.037,19.94 ; pad.2@34.655,21.098 34.798,20.955 pad.2@34.798,20.701
  Top Layer w0.3: CC2650MODA.23@33.491,21.098 pad.2@34.655,21.098 ; CC2650MODA.22@34.037,19.94 pad.2@34.798,20.701
  Bottom Layer w0.152: R28.2 18.161,11.326 pad.2@18.161,10.16
VCC1: BQ25570.14 COUT.2 L2.2 ON/OFF.3 | length 31.1
  Top Layer w0.152: L2.2 L2.2@17.401,3.429 ; 18.479,4.508 18.732,4.508
  Top Layer w0.3: ON/OFF.3 5.588,12.573 3.175,10.16 3.175,9.525 3.937,8.763 4.826,8.763 6.248,7.341 6.248,6.96 9.525,3.683 15.97,3.683 L2.2@16.383,3.556 ; L2.2@16.256,3.683 L2.2@16.383,3.556 ; 18.732,4.508 18.875,4.366 18.875,3.985 19.431,3.429 19.431,2.529 COUT.2 ; BQ25570.14@20.447,5.334 20.172,5.334 20.06,5.222 19.192,5.222 18.479,4.508 17.78,3.81 L2.2@17.172,3.81 ; L2.2@16.383,3.556 16.51,3.429 L2.2@16.637,3.556 ; L2.2@16.383,3.556 L2.2@16.637,3.556 ; L2.2@16.637,3.556 16.891,3.81 L2.2@17.172,3.81 ; L2.2@16.637,3.556 16.918,3.556 L2.2@17.172,3.81
VSTOR: BQ25570.3 BQ25570.6 BQ25570.19 CBYP.2 CSTOR.2 pad.2@24.13,2.286 pad.2@25.146,8.255 pad.2@26.162,6.731 | length 15.7
  Top Layer w0.152: BQ25570.19 BQ25570.19@23.249,4.192 ; BQ25570.6 24.583,7.692 pad.2@25.146,8.255 ; pad.2@24.13,2.286 24.361,2.286 24.996,1.651 CSTOR.2@25.504,1.651 ; BQ25570.3@24.399,5.842 BQ25570.3 24.892,5.842 25.625,5.989 pad.2@26.162,6.731
  Top Layer w0.252: BQ25570.19@23.241,3.683 23.237,3.196 pad.2@24.13,2.286
  Top Layer w0.3: CBYP.2@22.86,2.136 23.005,2.153 pad.2@24.13,2.286
  Bottom Layer w0.152: pad.2@24.13,2.286 pad.2@24.384,2.54 ; pad.2@25.146,8.255 26.162,7.493 pad.2@26.162,6.731
  Bottom Layer w0.252: pad.2@24.384,2.54 24.384,4.191 25.4,5.207 25.4,5.842 pad.2@26.035,6.477
pads on no net: CC2650MODA.2 CC2650MODA.24 IMU.2 IMU.3 IMU.4 IMU.5 IMU.6 IMU.7 IMU.14 IMU.15 IMU.16 IMU.17 IMU.19 IMU.21 JTAG.7 Micro-USB.2 Micro-USB.3 Micro-USB.4 Micro-USB.PAD1 Micro-USB.PAD2 Micro-USB.PAD3 Micro-USB.PAD4 Micro-USB.PAD5 Micro-USB.PAD6 Micro-USB.PAD7 Micro-USB.PAD8 Microph.None NMOS.2 NMOS.3 NMOS.5 NMOS.6 NMOS.8 OPT.5

## Polygon pours and split planes (outlines as drawn)
GND1 on Bottom Layer "Ground Layer-No Net" (solid, pour order 72): 32.512,8.636 32.512,0.254 11.938,0.254 11.938,8.636
GND1 on Bottom Layer "Top Layer-No Net 1" (solid, pour order 90): 32.131,2.921 31.921,9.652 35.56,9.652 35.56,2.921
GND on Bottom Layer "Ground Layer-No Net" (solid, pour order 70): 0.254,28.956 17.018,28.956 17.018,24.257 35.687,24.257 35.814,24.13 35.306,10.414 5.207,10.414 0.254,10.414
GND on Bottom Layer "Top Layer-No Net 1" (solid, pour order 88): 0.254,11.43 7.493,11.43 7.493,3.81 7.381,3.698 0.285,3.698 0.285,11.399
GND1 on Top Layer "Top Layer-No Net 1" (solid, pour order 84): 29.845,9.017 35.155,9.017 35.275,8.897 35.275,5.216 30.09,5.216 29.845,5.461
GND1 on Top Layer "Top Layer-No Net 1" (solid, pour order 78): 8.001,4.665 32.512,4.459 32.512,0.381 8.001,0.381
GND1 on Top Layer "Top Layer-No Net 1" (solid, pour order 92): 8.128,2.794 2.794,3.048 2.413,2.667 2.413,4.572 8.001,4.572 8.128,4.699 8.194,4.633
GND on Top Layer "Top Layer-No Net" (solid, pour order 76): 23.749,21.717 25.654,21.717 25.654,23.622 25.908,23.876 32.893,23.876 32.893,14.58 32.893,13.589 24.003,13.589 24.003,24.13 21.082,24.13 23.749,24.13 23.749,21.844 23.876,21.844
GND1 on Top Layer "Top Layer-No Net 1" (solid, pour order 82): 5.623,9.237 5.657,9.271 14.351,9.271 14.351,5.334 5.588,5.334 5.715,5.461 5.585,5.591 5.585,9.187
GND1 on Ground_Layer "Ground Layer-No Net" (solid, pour order 60): 8.001,8.255 32.385,8.128 32.258,4.051 32.258,0.254 8.001,0.254 8.001,8.128
GND on Ground_Layer "Ground_1" (solid, pour order 58): 0,29.083 14.224,29.083 19.05,24.257 20.066,24.13 35.433,24.13 35.56,12.065 35.814,9.271 0,9.271
GND1 on Ground_Layer "Top Layer-No Net 1" (solid, pour order 94): 32.131,8.128 35.275,8.128 35.275,3.175 32.131,3.175
GND1 on Ground_Layer "Top Layer-No Net 1" (solid, pour order 96): 1.778,2.921 1.778,8.128 8.128,8.128 8.128,2.921
VCC on Voltage_Layer "Voltage" (solid, pour order 56): 0.254,27.559 19.558,27.432 19.685,24.003 35.56,24.003 35.814,23.749 35.814,9.271 0.254,9.271

## Keep-outs
Keep-Out Layer:
  lines w0.254: 0,0 5.207,0 35.56,0 35.56,29.972 0,29.972 0,0

## Other copper
Top Layer:
  rectangle net REED: 33.655,14.986 34.163,15.748

## Silkscreen, mask and mechanical layers (free items; w line width, h text height)
Top Overlay:
  lines w0.177: 1.643,21.388 1.643,22.86 ; 3.945,21.261 3.945,22.733 ; 20.762,7.185 20.762,7.747 ; 20.765,3.867 20.765,4.429 ; 20.774,7.828 21.336,7.828 ; 20.901,3.856 21.382,3.856 ; 22.85,12.615 23.114,12.615 ; 24.084,7.828 24.524,7.828 ; 24.735,7.239 24.735,7.604 ; 32.856,12.615 33.983,12.615
  lines w0.178: 22.86,29.565 33.909,29.565
  lines w0.222: 33.95,24.76 33.95,29.55
  lines w0.225: 33.95,12.64 33.95,13.5
  lines w0.227: 22.85,12.65 22.85,13.5 ; 22.85,24.765 22.85,29.551
  text "+" at 11.938,26.416 h0.5
  text "1" at 19.304,25.527 h0.5 r90
  text "1" at 22.098,24.892 h0.5
  text "+" at 21.463,24.511 h0.38 r90
  text "1" at 4.445,22.733 h0.5
  text "-" at 12.065,21.463 h0.5
  text "1" at 8.763,11.811 h0.5
  text "+" at 30.861,11.303 h0.48 r90
  text "UCSD" at 0.254,10.033 h0.51
  text "MESL-v4" at 0.254,9.017 h0.51
  text "FraternaliF." at 0.254,8.128 h0.53
  text "+" at 32.258,7.62 h0.68 r90
  text "1" at 25.527,4.572 h0.38
  text "1" at 8.636,4.191 h0.5
  text "-" at 33.02,2.667 h0.48 r180
  text "+" at 9.525,1.27 h1 r90
Bottom Overlay:
  text "GND" at 4.953,17.145 h0.6 r90
  text "1" at 6.731,16.383 h0.5 r270
  text "VCC" at 4.953,14.859 h0.6 r90
  text "VOUT" at 4.953,11.176 h0.6 r90
  text "1" at 14.351,7.874 h0.5
  text "BAT+" at 9.906,6.477 h0.38
  text "BAT-" at 10.287,4.064 h0.38